# Altium PCB PCB1.PcbDoc
Units mil, origin at the board's own origin, x right, y up, seen from the top; angles counter-clockwise.
Board outline 2004.27 x 1003.91 mil, 4 copper layers (Top Layer, 5V, GND, Bottom Layer), stack 21.901 mil thick; 8 components, 7 nets, 27 pads, 14 vias.
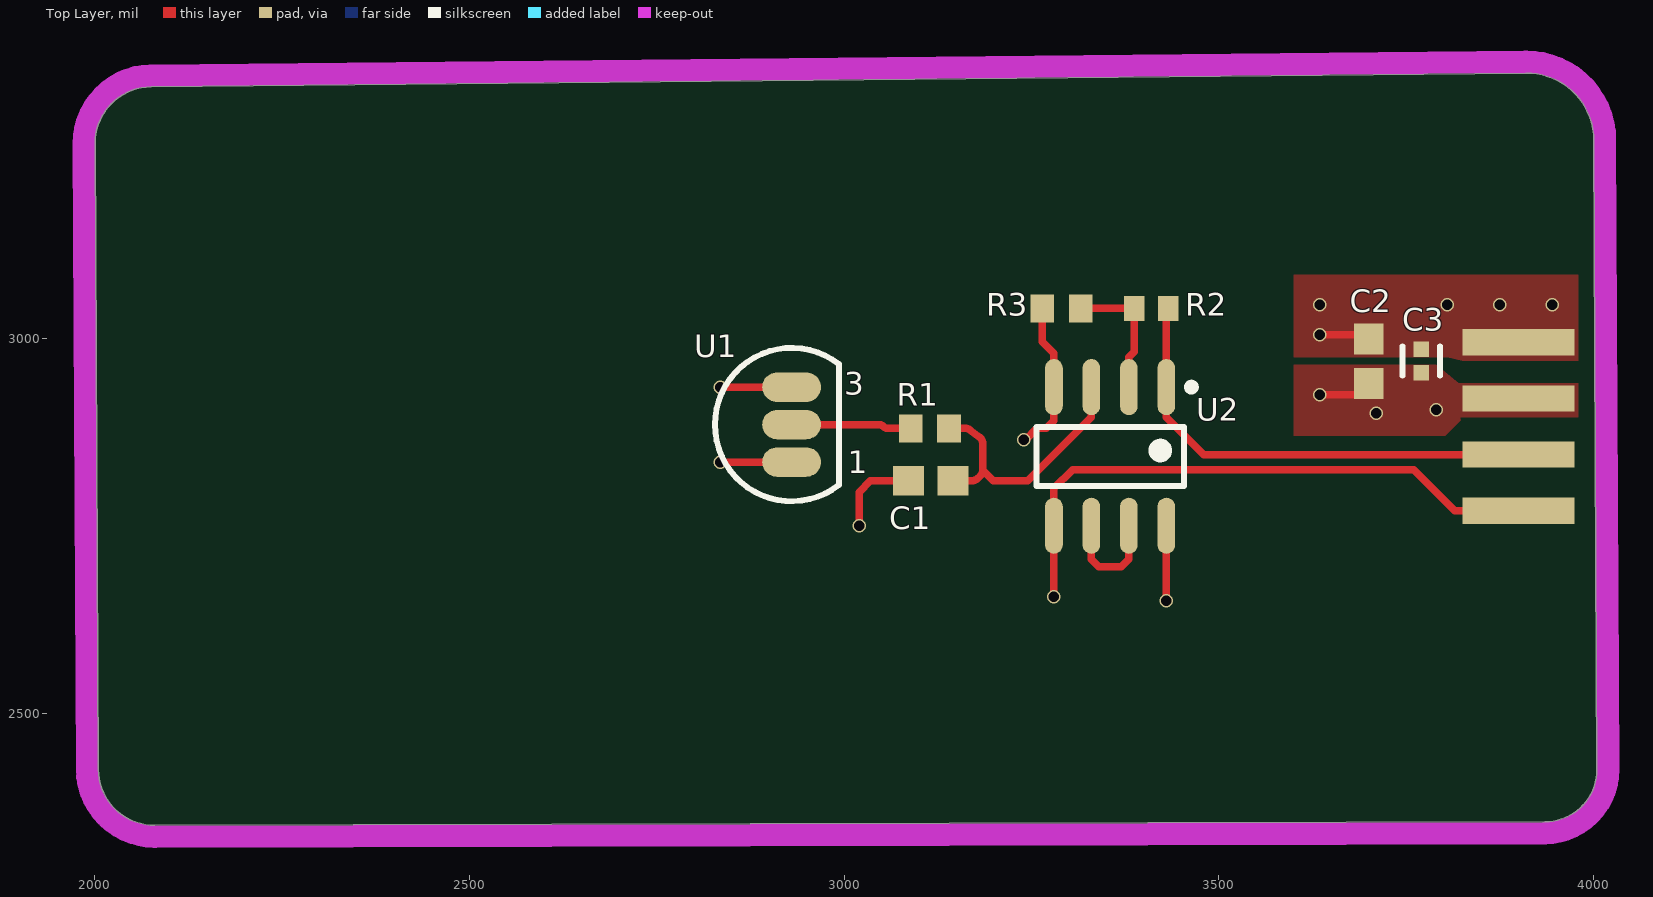
[diagram p0: Top Layer view]
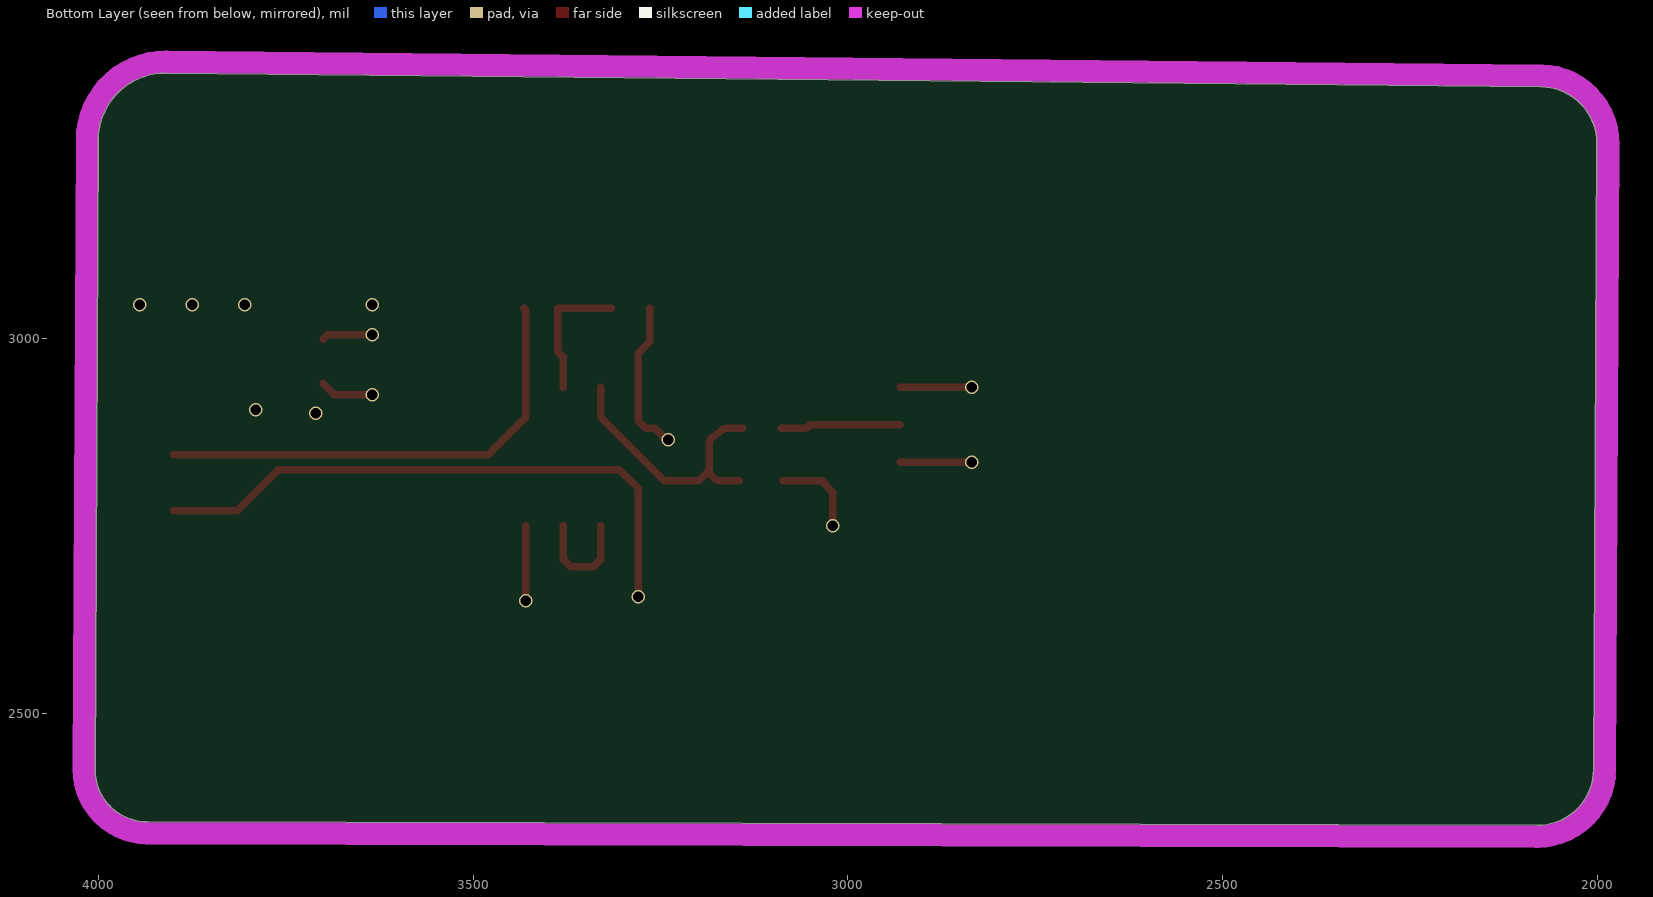
[diagram p1: Bottom Layer view, seen from below]
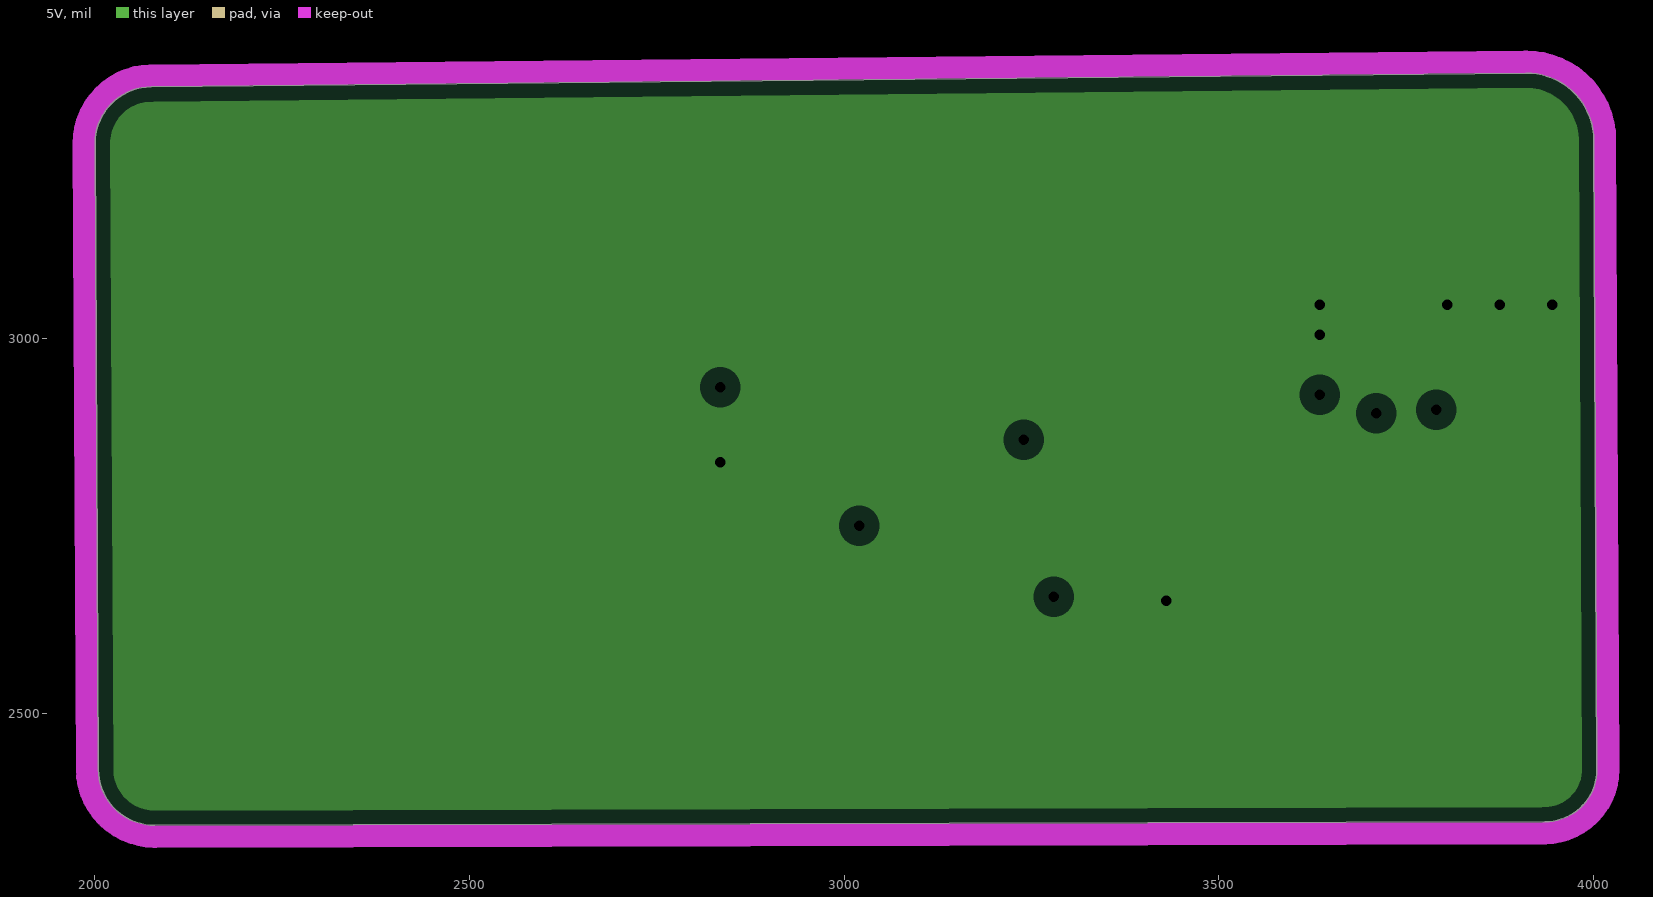
[diagram p2: 5V, clearances drawn from the general rule]
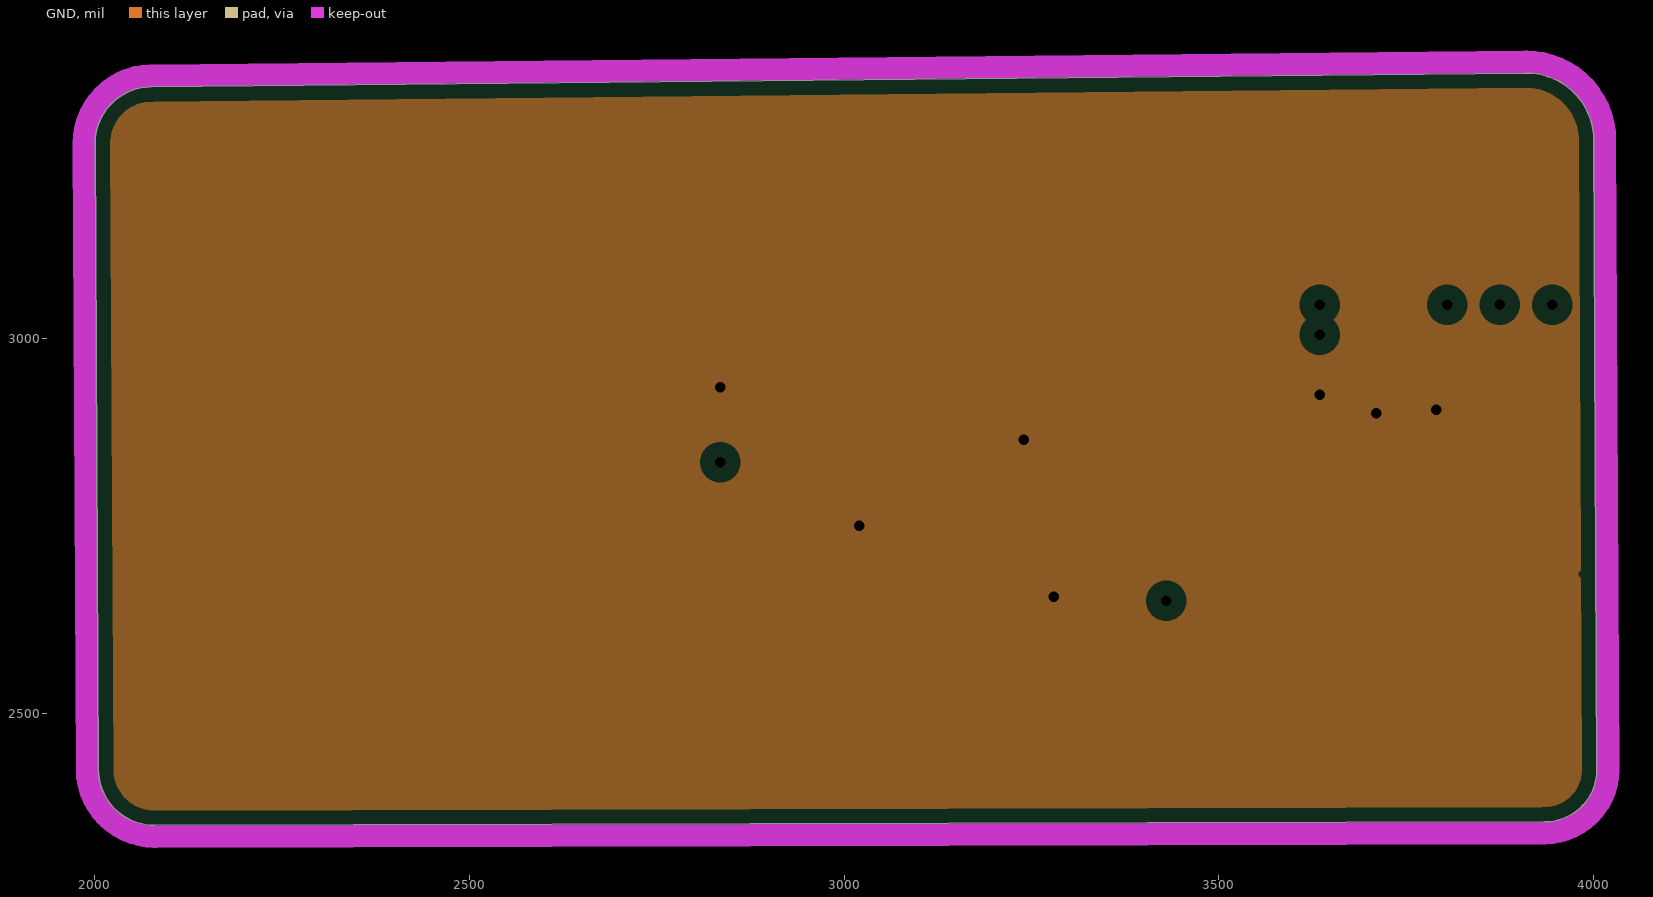
[diagram p3: GND, clearances drawn from the general rule]

## Layer stack, top to bottom
Top Solder: solder mask 0.4, Solder Resist, Dk 3.5
Top Layer: signal copper 0.4724
Dielectric 2: prepreg 2.8, PP-006, Dk 4.1
5V: plane copper 1.378, net P5V
Dielectric 1: dielectric 12.6, FR-4, Dk 4.8
GND: plane copper 1.378, net GND
Dielectric 3: prepreg 2.8, PP-006, Dk 4.1
Bottom Layer: signal copper 0.4724
Bottom Solder: solder mask 0.4, Solder Resist, Dk 3.5

## Board outline
2080.11,2350.19 3935.05,2354.83 ccw(c3934.88,2424.6) 4004.65,2424.95 4000.45,3264.93 ccw(c3910.83,3264.48) 3909.93,3354.1 2075.14,3335.75 ccw(c2075.9,3260.24) 2000.38,3259.86 2004.62,2425.11 ccw(c2079.93,2425.5)
cut-out: 1735,3505

## Design rules (kind name [scope] priority, off if disabled: settings)
Clearance [All] p1: gap=10 ignorepadtopadclearanceinfootprint=FALSE except(0: Arc-Hole Track-Hole SMDPad-Hole THPad-Hole Via-Hole Fill-Hole Poly-Hole Region-Hole Text-Hole)
PlaneClearance [All] p1: clearance=20
PlaneConnect [All] p1: planeconnectstyle=Relief reliefexpansion=20 reliefentries=4 reliefconductorwidth=10 reliefairgap=10
PolygonConnect [All] p1: connectstyle=Direct reliefconductorwidth=10 reliefentries=4 polygonreliefangle="90 Angle" airgapwidth=10
RoomDefinition Schem_Example [InComponentClass('Schem_Example')] p1: confinementstyle=ConfineIn formatcopy=TRUE lockcomponents=FALSE outline 4245,2165 1750,2165 1750,3505 4245,3505
RoutingVias [All] p1: holewidth=16 width=18 viastyle="Through Hole" minholewidth=10 minwidth=12 maxholewidth=260 maxwidth=280
SolderMaskExpansion [All] p1: expansion=4 istentingtop=FALSE
Width [All] p1: maxlimit=100 minlimit=10 preferedwidth=10
28 further rules are at their usual default settings.

## Components (designator, comment, footprint, x,y, rotation, side; value= is the part's Value field where it differs from the comment)
C1 "1u" CAPC1608X90X35NL15T15 3115.47,2810 r0 top
C2 "1u" CAPC1608X90X35NL15T15 3700,2969.53 r90 top
C3 "100n" FP-C0402-BB-MFG 3770,2969.8 r270 top value="0.10 μF"
R1 "10k" RESC1609X50X30NL8T20 3114.41,2880 r180 top
R2 "6.8k" RESC1609X50X30LL10T20 3410,3040 r0 top
R3 "10k" RESC1609X50X30NL8T20 3290,3040 r0 top
U1 "TMP36GT9Z" ADI-T-3 2930,2885 r0 top
U2 "OP284ESZ" ADI-R-8_L 3355,2842.52 r270 top

## Footprints (in the part's own frame and the unit in brackets; to place one, negate y for a bottom-side part, rotate by r counter-clockwise, add the part's x,y. Pads: shape width x height; smd on the part's side, far side on the other; paste and mask are expansions set on the pad)
ADI-R-8_L [mm] "SOIC, 8-Leads, Body 4.9x3.9mm, Pitch 1.27mm, IPC High Density"
  oval 1.9x0.6 smd: 1(-2.35,1.905) 2(-2.35,0.635) 3(-2.35,-0.635) 4(-2.35,-1.905) 5(2.35,-1.905) 6(2.35,-0.635) 7(2.35,0.635) 8(2.35,1.905)
  silkscreen extent -2.47,-2.5 1,2.88, body extent -2,-2.5 2,2.5, height 1.75
ADI-T-3 [mm] "TO, Flat Index; 3 In-Line, Axial Leads; Body Dia. 5.1mm; Leads 0.48 x 0.48 mm (max)"
  oval 2x1 smd: 1(0,-1.27) 2(0,0) 3(0,1.27)
  silkscreen extent -2.6,-2.6 1.6,2.6, body extent -2.6,-2.61 1.6,2.61, height 5.33
CAPC1608X90X35NL15T15 [mm] "Chip Capacitor, 2-Leads, Body 1.60x0.81mm, IPC Medium Density"
  rect 1.05x1 smd: 1(-0.75,0) 2(0.75,0)
  body extent -0.88,-0.48 0.87,0.48, height 0.9
FP-C0402-BB-MFG [mm]
  rect 0.52x0.52 smd paste+0 mask+0: 1(-0.4,0) 2(0.4,0)
  silkscreen extent -0.5,-0.64 0.5,0.64, body extent -0.8,-0.4 0.8,0.4, height 0.25
RESC1609X50X30LL10T20 [mm] "Chip Resistor, 2-Leads, Body 1.55x0.85mm, IPC High Density"
  rect 0.7x0.85 smd: 1(-0.575,0) 2(0.575,0)
  body extent -0.82,-0.48 0.82,0.48, height 0.5
RESC1609X50X30NL8T20 [mm] "Chip Resistor, 2-Leads, Body 1.65x0.95mm, IPC Medium Density"
  rect 0.8x0.95 smd: 1(-0.65,0) 2(0.65,0)
  body extent -0.82,-0.48 0.82,0.48, height 0.5

## Part data
C1 C2: library part CMP-2006-04474-1, Manufacturer="AVX Interconnect / Elco", Part Number=06036D105KAT2A
C3: library part CMP-03020-023811-1, "CAP CER 0.1UF 10V X5R 0402", Capacitance="0.10 μF", Manufacturer=Kemet, Manufacturer Part Number=C0402C104K8PACTU, Package=C0402-BB, Temperature="-55°C to +125°C", Temperature Characteristic=X5R, Temperature Coefficient=15%, Temperature Range High=+125°C, Temperature Range Low=-55°C, Tolerance=0.1, Voltage Rating="10 V", Automotive=No, Category=Cap, ComponentLink2Description=Datasheet, ComponentLink2URL=https://content.kemet.com/datasheets/KEM_C1002_X7R_SMD.pdf, Device Class L1="Passive Components", Device Class L2=Capacitors, Device Class L3="Ceramic Capacitors", Digikey Description="CAP CER 0.1UF 10V X5R 0402", Height=0.55mm, Ipc Land Pattern Name=CAPC10050X50, Lead Free=Yes, Material=Ceramic, Mouser Description="Capacitor 100 nF 10 VDC 0402", Octopart=https://octopart.com/c0402c104k8pactu-kemet-140039, RoHS=TRUE
R1 R3: library part CMP-1666-00005-4, "Chip Resistor, 10 KOhm, +/- 1%, 100 mW, -55 to 155 degC, 0603 (1608 Metric), RoHS, Tape and Reel", Manufacturer="Vishay Semiconductor", Max Operating Temperature="155 degC", Min Operating Temperature="-55 degC", Package Quantity=5000, Voltage Rating="75 V", ComponentLink1Description="Manufacturer URL", ComponentLink1URL=http://www.vishay.com/, ComponentLink2Description=Datasheet, ComponentLink2URL=https://datasheet.ciiva.com/11809/0900766b80d98afc-11809037.pdf, DatasheetVersion=06/2012, Height="0.45 mm", Length="1.55 mm", Mounting Technology="Surface Mount", PackageDescription="2-Pin Surface Mount Device, Body 1.575 x 0.85 mm", PackageReference=0603, Packaging="Tape and Reel", REACH SVHC=Unknown, RoHSCompliant=true
R2: library part CMP-2000-03550-1, Manufacturer="Vishay Dale", Part Number=CRCW06036K80FKEA
U1: library part CMP-0887-00067-1, "Low Voltage Temperature Sensor, 2.7 to 5.5 V Supply, Industrial, 3-pin TO92 (T-3), Tray", Manufacturer="Analog Devices", Supply Voltage Range="2.7 to 5.5 V", Code_JEDEC=TO-226-AA, ComponentLink1Description="Manufacturer URL", ComponentLink1URL=http://www.analog.com/en/index.html, ComponentLink2Description=Datasheet, ComponentLink2URL=http://www.analog.com/static/imported-files/data_sheets/TMP35_36_37.pdf, ComponentLink3Description="Package Specification", ComponentLink3URL=http://www.analog.com/static/imported-files/packages/PKG_PDF/TO-92(T)/T_3.pdf, ComponentLink4Description="Product URL", ComponentLink4URL=http://www.analog.com/en/mems-sensors/digital-temperature-sensors/tmp36/products/product.html, DatasheetVersion="Rev. F", Mounting Technology="Through Hole", PackageDescription="3-Pin Plastic Header-Style Package, 1.27 mm Pitch", PackageReference=T-3, PackageVersion="042208-A, 04/2008", Packing=Tray, PartNumber=TMP36GT9Z
U2: library part CMP-0384-00701-1, "Double Channel Single-Supply Operation Operational Amplifier, 4.25 MHz BW, 4 V/us SR, Industrial, 8-pin SOIC (R-8), Tube", Amplifiers Per Package=2, Generic Part Number=OP284, Input Bias Current=80nA, Input Offset Voltage=175uV, Manufacturer="Analog Devices", Code_JEDEC=MS-012-AA, ComponentLink1Description="Manufacturer URL", ComponentLink1URL=http://www.analog.com/en/index.html, ComponentLink2Description=Datasheet, ComponentLink2URL=http://www.analog.com/static/imported-files/data_sheets/OP184_284_484.pdf, ComponentLink3Description="Package Specification", ComponentLink3URL=http://www.analog.com/static/imported-files/packages/PKG_PDF/SOIC_Narrow%20(R)/R_8.pdf, DatasheetVersion="Rev. J", Iq/Amp=2mA, Mounting Technology="Surface Mount", PackageDescription="8-Pin Standard Small Outline Package, Body 3.9 x 4.9 mm, Pitch 1.27 mm", PackageReference=R-8, PackageVersion=060506-A, PartNumber=OP284ESZ, Slew Rate=4V/us, Small Signal Bandwidth=4.25MHz, V Span Max=36V, V Span Min=3V

## Free pads (board coordinates)
  rect 150x35 smd: 3(3900,2995) 4(3900,2920) 5(3900,2845) 6(3900,2770)

## Via types
v1: diameter 18, hole 14, Top Layer to Bottom Layer, 14 vias

## Nets (pads, with @x,y where several pads share a name; then routed paths per layer and width w, separated by ;. In a path a pad name is that pad's centre, name@x,y a point inside that pad or via, vN(x,y) a via of type N, cw(c..) or ccw(c..) an arc to the next point about the centre after c; other vN are vias at no path point)
GND: C1.1 C2.1 C3.2 pad.4 pad.6 R3.1 U1.3 U2.4 U2.5 | length 1288.5
  Top Layer w10: v1(2835,2935) U1.3 ; v1(3020,2750) 3020,2795 3035,2810 C1.1 ; v1(3240,2865) 3242.16,2865 3257.16,2880 3270,2880 3280,2890 U2.4 3280,2980 3264.41,2995.59 R3.1 ; v1(3280,2655) U2.5 3280,2800 3305,2825 3760,2825 3815,2770 pad.6 ; v1(3635,2925) 3685.31,2925 3700,2939.69 C2.1
  other v1: 3710,2900 3790,2905
NetC1_2: C1.2 R1.1 U2.3 | length 363.4
  Top Layer w10: R1.1 3161.67,2880 cw(c3161.67,2870) 3167.7,2877.98 3181,2868 cw(c3175,2860) 3185,2859.96 3185,2835 3185,2824.14 ; C1.2 3170.89,2810.02 ccw(c3170.88,2820.02) 3177.93,2812.93 3182.07,2817.07 ccw(c3175,2824.14) 3185,2824.14 ; U2.3 3330,2895 3245,2810 3199.14,2810 3185,2824.14
NetR1_2: R1.2 U1.2 | length 160
  Top Layer w10: U1.2 3045.86,2885 cw(c3045.86,2875) 3052.47,2882.5 ccw(c3059.09,2890) 3059.09,2880 R1.2
NetR2_1: R2.1 R3.2 U2.2 | length 179.8
  Top Layer w10: R3.2 R2.1 3387.36,2982.36 3380,2975 U2.2
NetR2_2: pad.5 R2.2 U2.1 | length 636.8
  Top Layer w10: R2.2 3430,3037.36 U2.1 3430,2895 3480,2845 pad.5
NetU2_6: U2.6 U2.7 | length 148.3
  Top Layer w10: U2.6 3330,2705 3340,2695 3370,2695 3380,2705 U2.7
P5V: C2.2 C3.1 pad.3 U1.1 U2.8 | length 262.5
  Top Layer w10: v1(2835,2835) U1.1 ; v1(3430,2650) U2.8 ; v1(3635,3005) 3694.06,3005 C2.2
  other v1: 3635,3045 3805,3045 3875,3045 3945,3045

## Polygon pours and split planes (outlines as drawn)
GND on Top Layer "GND_L01_P008" (solid, pour order 8): 3827.5,2895 3802.5,2870 3600,2870 3600,2910
P5V on Top Layer "P5V_L01_P007" (solid, pour order 7): 3980,3025 3980,3085 3600,3085 3600,2975
GND on Top Layer "GND_L01_P006" (solid, pour order 6): 3675,2964.8 3600.2,2964.8 3600,2965 3600,2895 3720,2895 3720,2965
P5V on Top Layer "P5V_L01_P005" (solid, pour order 5): 3600,2975 3600,3055 3605,3060 3675,3060 3715,3020 3715,2975
GND on Top Layer "GND_L01_P002" (solid, pour order 2): 3980,2940 3820,2940 3790,2965 3675,2965 3675,2895 3980,2895
P5V on Top Layer "P5V_L01_P001" (solid, pour order 1): 3675,3025 3980,3025 3980,2970 3825,2970 3805,2975 3675,2975
P5V on 5V (split plane): 3930.5,3331.52 3943.24,3326.37 3954.73,3318.83 3964.51,3309.19 3972.23,3297.82 3977.56,3285.16 3980.32,3271.7 3980.35,3264.83 3984.55,2424.85 3984.58,2419.95 3982.71,2410.33 3979,2401.25 3973.59,2393.08 3966.68,2386.13 3958.55,2380.65 3949.51,2376.87 3939.9,2374.93 3935,2374.92 2080.06,2370.28 2074.64,2370.27 2063.98,2372.36 2053.94,2376.48 2044.89,2382.48 2037.18,2390.13 2031.11,2399.14 2026.91,2409.15 2024.74,2419.79 2024.71,2425.22 2020.48,3259.96 2020.45,3265.4 2022.51,3276.08 2026.61,3286.16 2032.6,3295.25 2040.23,3303.01 2049.23,3309.13 2059.25,3313.38 2069.9,3315.6 2075.34,3315.66 3910.13,3334 3917,3334.07
GND on GND (split plane): 3930.5,3331.52 3943.24,3326.37 3954.73,3318.83 3964.51,3309.19 3972.23,3297.82 3977.56,3285.16 3980.32,3271.7 3980.35,3264.83 3983.23,2689.75 3983.02,2689.71 3981.36,2688.61 3980.26,2686.95 3979.87,2685 3980.26,2683.05 3981.36,2681.4 3983.02,2680.29 3983.28,2680.24 3984.55,2424.85 3984.58,2419.95 3982.71,2410.33 3979,2401.25 3973.59,2393.08 3966.68,2386.13 3958.55,2380.65 3949.51,2376.87 3939.9,2374.93 3935,2374.92 2080.06,2370.28 2074.64,2370.27 2063.98,2372.36 2053.94,2376.48 2044.89,2382.48 2037.18,2390.13 2031.11,2399.14 2026.91,2409.15 2024.74,2419.79 2024.71,2425.22 2020.48,3259.96 2020.45,3265.4 2022.51,3276.08 2026.61,3286.16 2032.6,3295.25 2040.23,3303.01 2049.23,3309.13 2059.25,3313.38 2069.9,3315.6 2075.34,3315.66 3910.13,3334 3917,3334.07

## Keep-outs
Keep-Out Layer:
  lines w30: 4015.45,3264.93 ccw(c4000.45,3264.93) 4015.45,3264.98 ; 1989.62,2425.04 ccw(c2079.93,2425.5) 2080.09,2335.19 ; 1989.62,2425.05 ccw(c2004.62,2425.11) 1989.62,2425.04 ; 1989.62,2425.05 1985.38,3259.78 cw(c2075.9,3260.24) 2074.99,3350.75 3909.78,3369.1 ; 1989.62,2425.05 1989.62,2425.04 ; 2080.09,2335.19 ccw(c2079.93,2425.5) 2080.15,2335.19 ; 2080.09,2335.19 ccw(c2080.11,2350.19) 2080.15,2335.19 ; 2080.15,2335.19 3935.09,2339.82 ccw(c3934.88,2424.6) 4019.65,2424.6 ccw(c3934.88,2424.6) 4019.65,2424.92 ; 3909.78,3369.1 cw(c3910.83,3264.48) 3909.91,3369.1 ; 3909.78,3369.1 cw(c3909.93,3354.1) 3909.91,3369.1 ; 3909.91,3369.1 cw(c3910.83,3264.48) 4015.45,3265 ; 4015.45,3264.98 ccw(c4000.45,3264.93) 4015.45,3265 ; 4015.45,3265 4015.45,3264.98 ; 4015.45,3264.98 4019.65,2425.02 ; 4019.65,2424.92 ccw(c3934.88,2424.6) 4019.65,2425.02 ; 4019.65,2424.92 ccw(c4004.65,2424.95) 4019.65,2424.95 ccw(c4004.65,2424.95) 4019.65,2425.02

## Other copper
GND (plane layer: these items are gaps in the copper):
  lines w10: 3984.97,2685 4005,2685

## Text inside footprints (layer, text, board x,y; h text height)
U1: Top Overlay "3" at 3000,2925 h30; Top Overlay "1" at 3005,2820 h30